# Altium PCB PCB1.PcbDoc (part 7 of 12)
Units mm, origin at the board's own origin, x right, y up, seen from the top; angles counter-clockwise.
Board outline 100 x 100 mm, 6 copper layers (Top Layer, Int1 (GND), Int2 (Sign), Int3 (Sign), Int4 (PWR), Bottom Layer), stack 1.538 mm thick; 614 components, 712 nets, 3014 pads, 1096 vias.
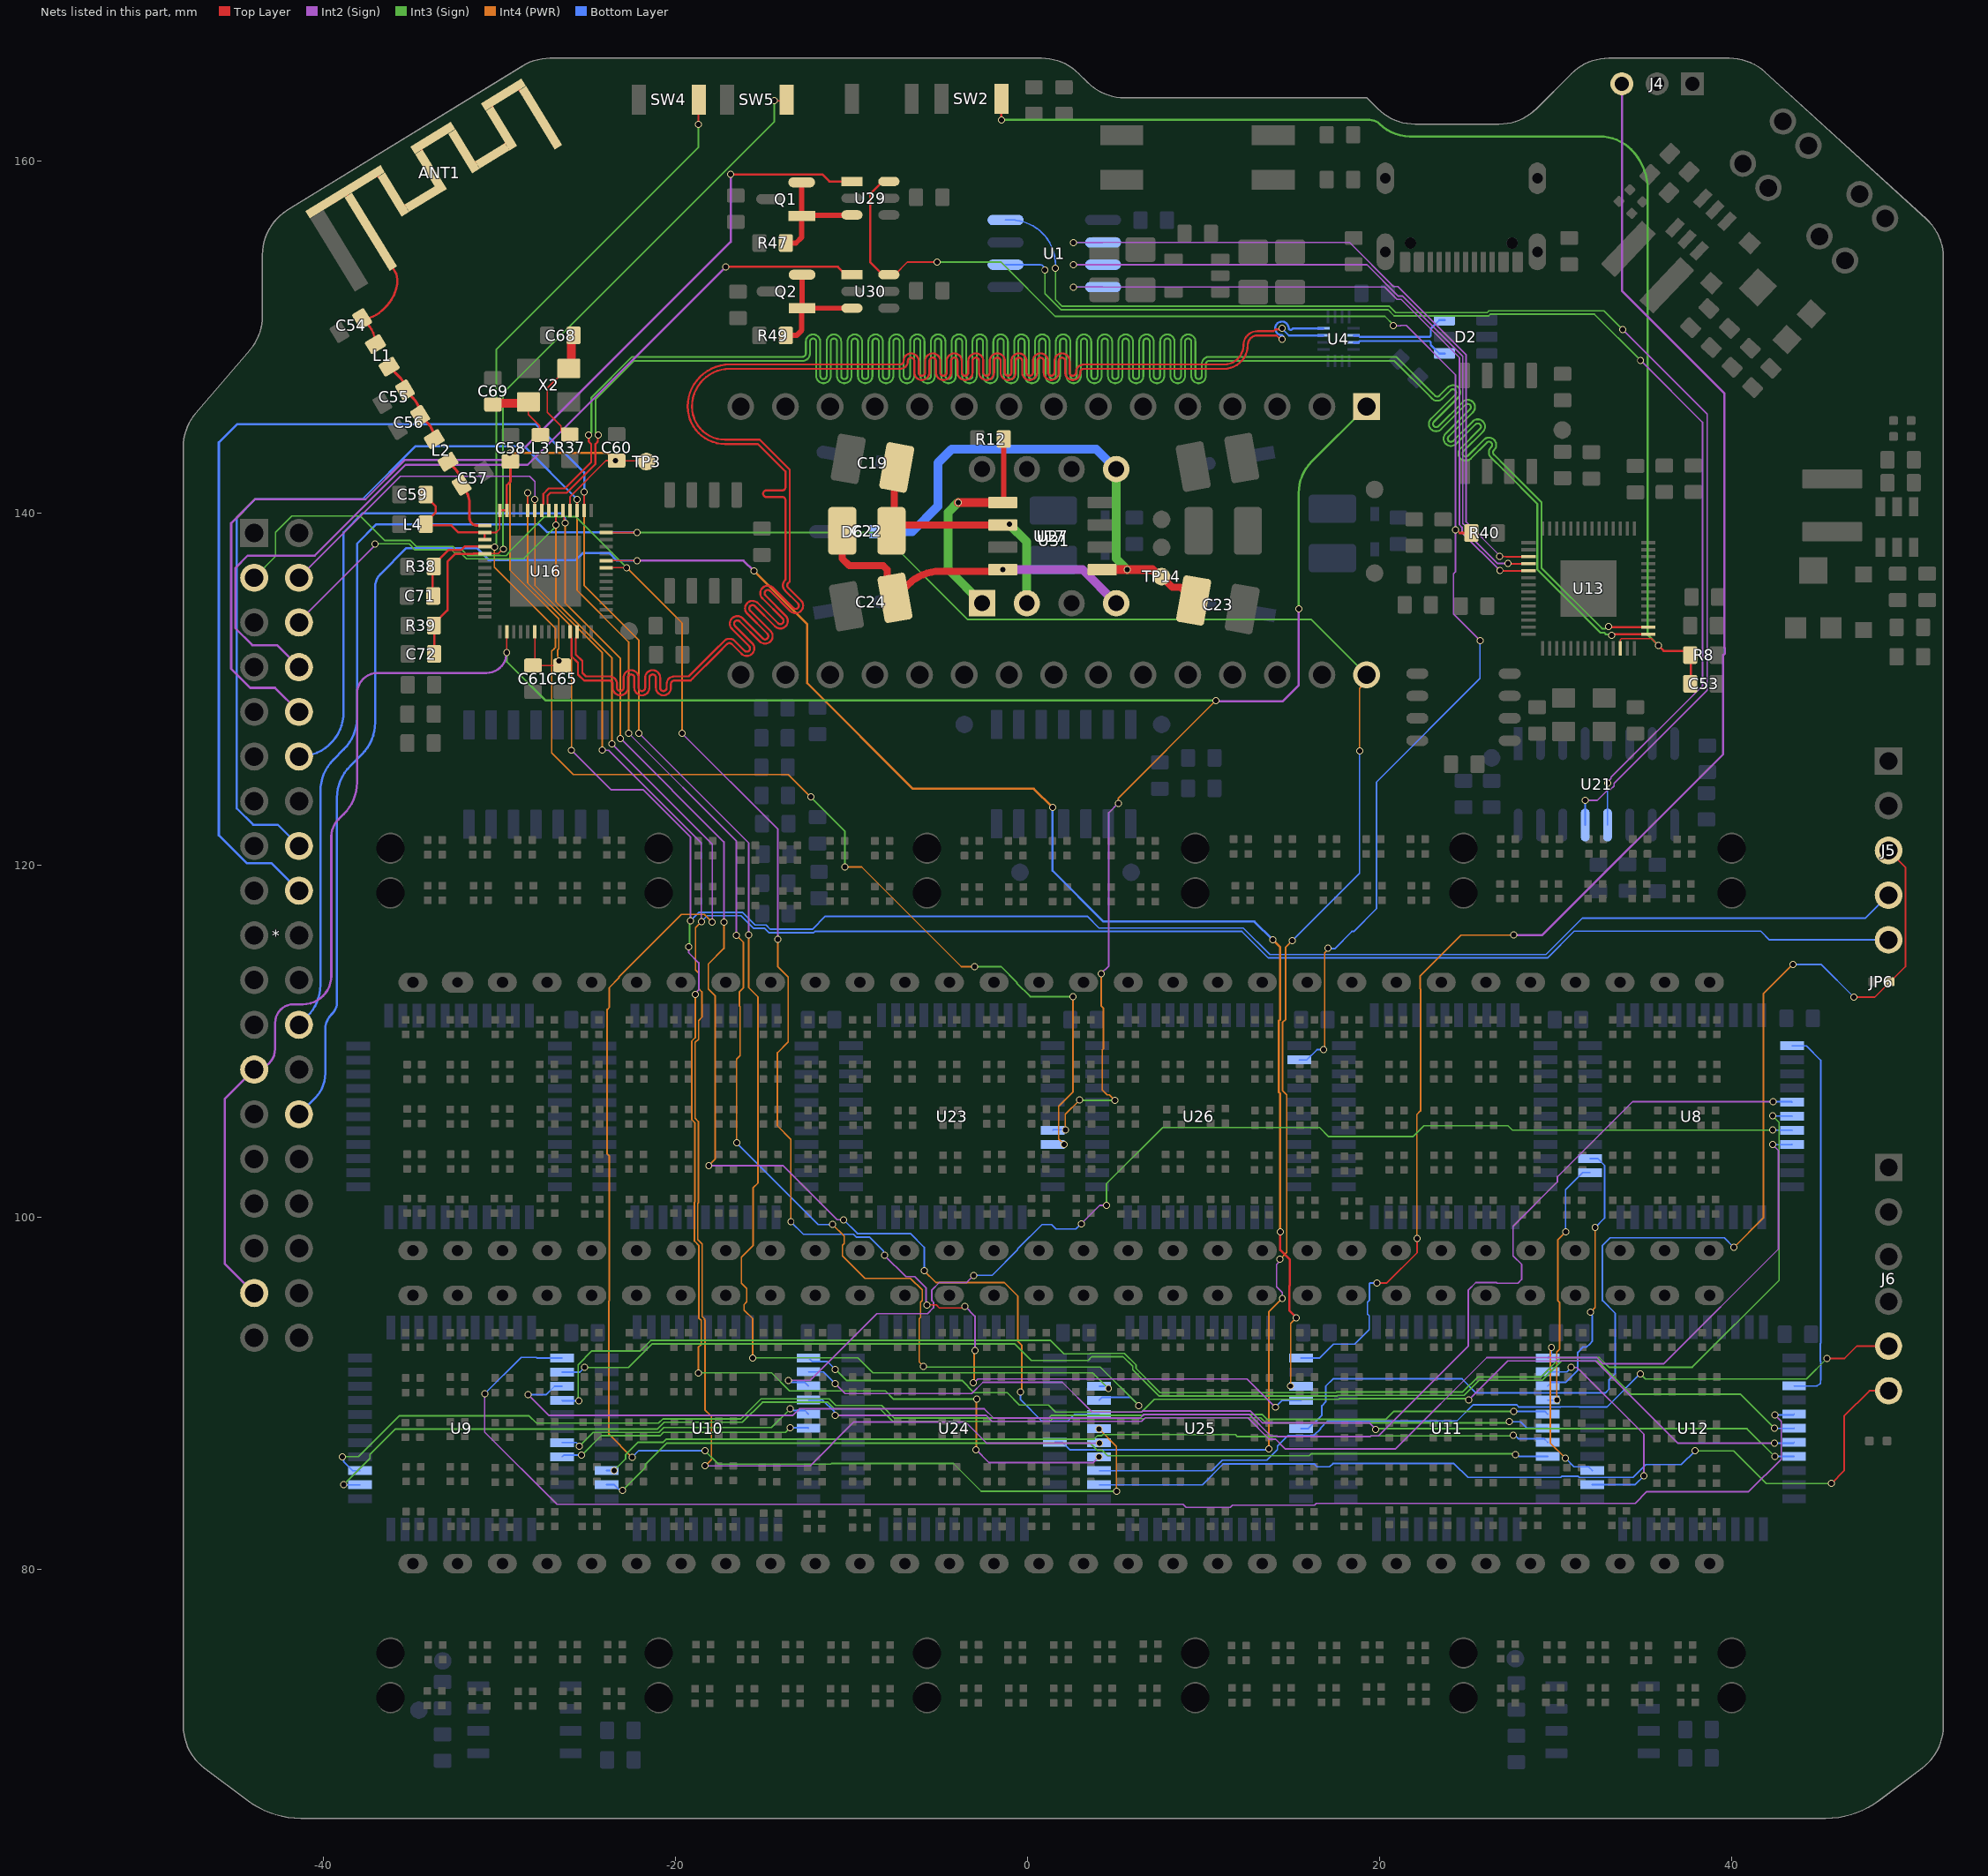
[diagram p10: the nets of this part, all layers, seen from the top]

## Via types
v1: diameter 0.4, hole 0.3, Top Layer to Bottom Layer, tented both sides, 1087 vias
v2: diameter 0.4, hole 0.3, Top Layer to Bottom Layer, 6 vias
v3: diameter 0.4, hole 0.3, Top Layer to Bottom Layer, tented top, 2 vias
v4: diameter 0.6, hole 0.5, Top Layer to Bottom Layer, 1 vias

## Nets (pads, with @x,y where several pads share a name; then routed paths per layer and width w, separated by ;. In a path a pad name is that pad's centre, name@x,y a point inside that pad or via, vN(x,y) a via of type N, cw(c..) or ccw(c..) an arc to the next point about the centre after c; other vN are vias at no path point) (continued)
D12: *.24 U16.41 U24.7 U31.30 | length 150.6
  Top Layer w0.09: U16.41@-23.952,138.918 v1(-22.187,138.918)
  Int2 (Sign) w0.09: v1(14.323,97.615) 14.263,97.556 14.263,97.454 14.136,97.328 14.136,96.063 14.462,95.738 v1(14.462,95.399)
  Int3 (Sign) w0.09: v1(-22.187,138.918) -8.364,138.918 -3.415,133.969 16.109,133.969 U31.30@19.251,130.827
  Int4 (PWR) w0.09: v1(13.691,86.836) 13.691,94.628 v1(14.462,95.399) ; v1(14.323,97.615) 14.715,98.008 14.715,106.963 14.467,107.211 14.467,111.068 14.655,111.255 14.655,115.351 v1(15.035,115.732) ; v1(18.852,126.499) 18.852,130.057 19.251,130.456 U31.30@19.251,130.827
  Bottom Layer w0.09: U24.7@1.54,87.223 1.965,87.223 2.385,86.803 13.657,86.803 v1(13.691,86.836) ; v1(15.035,115.732) 18.852,119.548 v1(18.852,126.499)
  Bottom Layer w0.127: *.24@-41.409,110.943 -40.936,111.416 ccw(c-42.732,113.212) -40.192,113.212 -40.192,124.209 cw(c-37.652,124.209) -39.448,126.005 -38.859,126.595 ccw(c-40.655,128.391) -38.115,128.391 -38.115,138.272 -37.004,139.383 -27.759,139.383 -27.294,138.918 v1(-22.187,138.918)
D13: *.25 *.35 U16.16 U23.7 U31.1 | length 144.4
  Top Layer w0.09: v1(-29.606,132.085) -29.606,132.58 -29.604,132.581 U16.16@-29.604,133.265
  Int2 (Sign) w0.09: v1(4.167,113.85) 4.605,114.287 4.605,122.995 v1(5.137,123.527)
  Int2 (Sign) w0.127: *.35@-43.949,95.703 -45.632,97.385 -45.632,106.72 *.25@-43.949,108.403 ccw(c-43.949,109.587) -42.765,109.587 -42.765,111.06 cw(c-41.715,111.06) -41.715,112.11 -41.189,112.11 ccw(c-41.189,113.729) -39.57,113.729 -39.57,121.638 cw(c-38.198,121.638) -39.168,122.608 -38.859,122.917 ccw(c-40.655,124.713) -38.115,124.713 -38.115,129.75 cw(c-36.93,129.75) -36.93,130.935 -30.754,130.935 ccw(c-30.754,132.085) -29.698,131.631 ; -29.69,131.657 v1(-29.606,132.085) ; v1(10.695,129.365) 10.744,129.316 14.464,129.316 15.39,130.243 v1(15.39,134.565)
  Int3 (Sign) w0.09: v1(2.95,106.675) 2.967,106.658 4.937,106.658 v1(4.954,106.641)
  Int3 (Sign) w0.127: v1(-29.606,132.085) -29.606,131.579 -27.391,129.364 v1(10.695,129.365) v1(10.695,129.365) ; v1(15.39,134.565) 15.39,141.154 cw(c17.93,141.154) 16.134,142.95 U31.1@19.251,146.067
  Int4 (PWR) w0.09: v1(2.129,104.981) 2.129,105.854 v1(2.95,106.675) ; v1(4.167,113.85) 4.167,112.021 4.301,111.887 4.301,109.594 4.237,109.53 4.237,107.237 4.505,106.968 4.626,106.968 v1(4.954,106.641) ; v1(5.137,123.527) 5.137,123.812 10.69,129.365 v1(10.695,129.365)
  Bottom Layer w0.09: U23.7@1.422,104.948 1.455,104.981 v1(2.129,104.981)
DAC-SS_1: U1.2 U13.3 | length 40.5
  Top Layer w0.09: v1(26.809,137.563) 27.182,137.535 ; U13.3@28.453,137.535 27.189,137.535 ; 27.182,137.535 ccw(c27.189,137.625) 27.189,137.535 ; 27.182,137.535 ccw(c27.189,137.625) 27.189,137.535
  Int2 (Sign) w0.09: v1(2.592,155.388) 18.283,155.388 20.782,152.888 21.02,152.888 24.904,149.004 24.904,139.513 26.809,137.608 v1(26.809,137.563)
  Bottom Layer w0.09: v1(2.592,155.388) U1.2@4.275,155.388
DAC_0_OUT_9: U1.8 U21.13 | length 72.8
  Int2 (Sign) w0.09: v1(31.67,123.689) 32.347,123.689 32.954,124.296 33.094,124.296 33.312,124.514 33.312,124.654 38.605,129.947 38.605,145.642 v1(33.81,150.437)
  Int3 (Sign) w0.09: v1(1.575,153.915) 1.575,152.148 1.959,151.764 20.542,151.764 20.896,151.411 26.103,151.411 26.197,151.504 32.742,151.504 v1(33.81,150.437)
  Bottom Layer w0.09: U1.8@-1.265,156.668 -0.965,156.668 cw(c-0.965,154.128) 1.575,154.128 v1(1.575,153.915) ; U21.13@31.67,122.292 v1(31.67,123.689)
DAC_1_OUT_9: U1.6 U21.12 | length 69.3
  Int2 (Sign) w0.09: v1(32.94,124.668) 32.94,124.744 33.138,124.943 33.138,125.007 38.336,130.204 38.336,145.174 v1(34.815,148.695)
  Int3 (Sign) w0.09: v1(0.975,153.825) 0.975,152.48 1.88,151.574 20.464,151.574 20.817,151.221 26.181,151.221 26.275,151.314 32.196,151.314 v1(34.815,148.695)
  Bottom Layer w0.09: U1.6@-1.265,154.128 0.672,154.128 cw(c0.672,153.825) v1(0.975,153.825) ; U21.12@32.94,122.292 v1(32.94,124.668)
DAC_CLOCK_1: U1.3 U13.4 | length 40.3
  Top Layer w0.09: v1(27.29,137.152) 27.308,137.135 U13.4@28.453,137.135
  Int2 (Sign) w0.09: v1(2.592,154.128) 19.274,154.128 21.057,152.345 21.295,152.345 24.714,148.925 24.714,139.434 24.861,139.286 24.861,138.984 26.693,137.152 v1(27.29,137.152)
  Bottom Layer w0.09: v1(2.592,154.128) U1.3@4.275,154.128
DAC_DATA_1: U1.4 U13.5 | length 40
  Top Layer w0.09: v1(26.82,136.761) 26.845,136.735 U13.5@28.453,136.735
  Int2 (Sign) w0.09: v1(2.592,152.858) 20.275,152.858 20.979,152.155 21.216,152.155 24.524,148.847 24.524,139.355 24.671,139.208 24.671,138.905 26.816,136.761 v1(26.82,136.761)
  Bottom Layer w0.09: v1(2.592,152.858) U1.4@4.275,152.858
DE0_3: U8.5 U9.3 | length 87.8
  Int2 (Sign) w0.09: v1(-28.384,89.927) -27.215,88.758 -13.339,88.758 -12.971,89.127 -2.469,89.127 -1.945,88.603 6.38,88.603 6.528,88.751 6.541,88.751 6.598,88.808 12.577,88.808 13.797,87.588 14.155,87.588 14.201,87.543 19.44,87.543 19.486,87.589 19.928,87.589 25.033,92.694 25.033,94.751 ; 25.033,94.751 25.033,95.275 25.031,95.277 25.031,95.875 25.454,96.298 26.63,96.298 26.665,96.262 27.841,96.262 28.059,96.48 28.059,97.328 27.571,97.817 27.571,99.499 30.092,102.021 30.092,102.307 34.361,106.576 v1(42.35,106.576)
  Bottom Layer w0.09: v1(-28.384,89.927) -27.366,89.927 -26.885,90.408 U9.3@-26.46,90.408 ; v1(42.35,106.576) 43.394,106.576 U8.5@43.422,106.548
DE1_3: U8.6 U9.4 | length 86.9
  Int3 (Sign) w0.09: v1(-25.503,89.586) -25.548,89.632 -25.548,91.629 -24.76,92.418 -22.011,92.418 -21.422,93.007 1.301,93.007 1.904,92.404 1.904,92.398 2.05,92.252 3.531,92.252 3.556,92.278 5.495,92.278 6.151,91.621 6.151,91.422 7.525,90.048 17.508,90.048 17.544,90.084 24.712,90.084 25.559,90.932 29.142,90.932 30.248,92.037 32.471,92.037 33.019,91.49 37.755,91.49 42.688,96.422 42.688,105.398 v1(42.323,105.763)
  Bottom Layer w0.09: U9.4@-26.46,89.608 -26.439,89.586 v1(-25.503,89.586) ; v1(42.323,105.763) 43.407,105.763 U8.6@43.422,105.748
DEV_BOOT: *.28 U16.37 U25.3 | length 125
  Top Layer w0.09: U16.37@-23.952,137.318 v1(-22.199,137.318)
  Top Layer w0.127: v1(14.343,99.191) 14.343,98.147 14.899,97.591 14.899,96.139 14.852,96.093 14.852,94.719 15.247,94.324 v1(15.247,94.292)
  Int2 (Sign) w0.127: v1(-22.199,137.318) -16.156,137.318 v1(-15.565,136.727)
  Int4 (PWR) w0.09: v1(14.937,90.42) 14.937,93.982 v1(15.247,94.292)
  Int4 (PWR) w0.127: v1(-15.565,136.727) -12.525,133.687 -12.525,130.352 -6.531,124.358 0.342,124.358 v1(1.409,123.291) ; v1(13.914,115.771) 14.343,115.342 14.343,111.239 14.259,111.154 14.259,107.124 14.343,107.04 v1(14.343,99.191)
  Bottom Layer w0.127: *.28@-41.409,105.863 -40.503,106.769 ccw(c-41.923,108.189) -39.915,108.189 -39.915,110.689 cw(c-38.737,110.689) -39.57,111.521 -39.533,111.559 ccw(c-40.227,112.253) -39.245,112.253 -39.245,123.846 cw(c-36.705,123.846) -38.501,125.642 -37.824,126.319 ccw(c-39.62,128.115) -37.08,128.115 -37.08,135.831 cw(c-36.083,135.831) -36.788,136.536 -35.3,138.024 -31.301,138.024 -30.625,137.347 -25.684,137.347 -25.291,137.74 -23.767,137.74 -23.345,137.318 v1(-22.199,137.318) ; v1(1.409,123.291) 1.409,119.698 4.299,116.808 12.877,116.808 v1(13.914,115.771)
DEV_RESET: *.3 U16.36 U25.4 | length 105.9
  Top Layer w0.09: U16.36@-23.952,136.918 v1(-22.788,136.918) ; v1(-5.726,95.028) -5.201,95.028 -5.026,94.854 -3.743,94.854 -3.647,94.95 v1(-3.563,94.95)
  Int2 (Sign) w0.09: v1(-19.648,127.506) -14.197,122.055 v1(-14.197,115.809) ; v1(-8.142,97.856) -8.142,97.847 -6.929,96.635 -6.419,96.635 -5.775,95.991 -5.775,95.077 v1(-5.726,95.028) ; v1(-3.563,94.95) -3.002,94.388 v1(-3.002,92.445) ; v1(-3.093,90.614) -3.038,90.614 -2.828,90.824 12.456,90.824 v1(14.063,89.217)
  Int3 (Sign) w0.09: *.3@-43.949,136.343 -42.736,137.556 -42.736,138.931 -41.812,139.855 -37.929,139.855 -36.532,138.458 -35.077,138.458 -34.737,138.118 -32.668,138.118 -32.5,137.949 -32.156,137.949 -31.812,137.605 -29.952,137.605 -29.947,137.599 -29.638,137.599 -29.42,137.817 -29.42,137.846 -27.449,139.818 -26.453,139.818 -26.451,139.821 -26.447,139.821 -26.446,139.822 -26.137,139.822 -26.133,139.818 -25.688,139.818 v1(-22.788,136.918)
  Int4 (PWR) w0.09: v1(-22.788,136.918) -19.648,133.778 v1(-19.648,127.506) ; v1(-14.197,115.809) -14.197,114.237 -13.615,113.655 -13.615,109.964 -14.228,109.351 -14.228,105.207 -13.463,104.441 v1(-13.463,99.752) ; v1(-3.093,90.614) -3.047,90.66 -3.047,92.4 v1(-3.002,92.445)
  Bottom Layer w0.09: v1(-13.463,99.752) -12.75,99.039 -9.905,99.039 -9.752,98.887 -9.007,98.887 -8.201,98.081 -8.201,97.915 v1(-8.142,97.856) ; v1(14.063,89.217) 14.454,89.608 U25.4@15.525,89.608
DF0_3: U8.7 U10.3 | length 66.5
  Int2 (Sign) w0.09: v1(-13.601,90.742) -12.354,90.742 -8.569,94.527 -5.702,94.527 -5.354,94.874 -5.354,95.182 -5.449,95.277 -5.449,95.875 -5.026,96.298 -3.479,96.298 v1(-3.067,96.71) ; v1(3.041,99.642) 4.086,100.686 v1(4.47,100.686)
  Int3 (Sign) w0.09: v1(4.47,100.686) 4.47,101.915 7.667,105.112 16.579,105.112 17.103,104.588 21.881,104.588 22.504,105.21 27.281,105.21 27.532,104.96 v1(42.316,104.96)
  Bottom Layer w0.09: v1(-13.601,90.742) -13.518,90.742 -13.404,90.628 -12.665,90.628 U10.3@-12.46,90.423 ; v1(-3.067,96.71) -2.022,96.71 -0.576,98.156 -0.576,98.208 0.811,99.595 1.356,99.595 1.611,99.34 2.74,99.34 v1(3.041,99.642) ; v1(42.316,104.96) 43.41,104.96 U8.7@43.422,104.948
DF1_3: U8.8 U10.4 | length 68.7
  Int2 (Sign) w0.09: v1(-10.932,88.755) -2.366,88.755 -2.024,88.413 6.458,88.413 6.606,88.561 6.619,88.561 6.677,88.618 12.498,88.618 13.718,87.398 14.077,87.398 14.63,86.845 20.887,86.845 26.08,92.037 32.336,92.037 32.694,91.68 36.127,91.68 42.649,98.201 42.649,103.799 v1(42.316,104.133)
  Bottom Layer w0.09: U10.4@-12.46,89.623 -11.65,89.623 -10.992,88.964 -10.992,88.814 v1(-10.932,88.755) ; v1(42.316,104.133) 43.407,104.133 U8.8@43.422,104.148
DG0_3: U8.25 U11.3 | length 15.6
  Int4 (PWR) w0.09: v1(31.968,94.614) 32.234,94.88 v1(32.234,99.425)
  Bottom Layer w0.09: U11.3@29.54,90.423 29.745,90.628 30.556,90.628 31.25,91.321 31.25,92.333 31.558,92.641 31.759,92.641 31.924,92.806 32.068,92.949 32.068,93.952 32.068,94.431 31.926,94.572 v1(31.968,94.614) ; U8.25@31.952,103.348 32.377,103.348 32.772,102.953 32.772,99.963 v1(32.234,99.425)
DG1_3: U8.24 U11.4 | length 14.6
  Int4 (PWR) w0.09: v1(30.058,89.623) 30.058,92.354 30.222,92.518 30.222,95.166 30.111,95.277 30.111,98.726 v1(30.557,99.173)
  Bottom Layer w0.09: U11.4@29.54,89.623 v1(30.058,89.623) ; v1(30.557,99.173) 30.557,101.578 31.527,102.548 U8.24@31.952,102.548
DH0_3: U8.1 U12.3 | length 21.9
  Bottom Layer w0.09: U8.1@43.422,109.748 44.232,109.748 45.05,108.93 45.05,92.856 45.036,92.843 45.036,91.833 45.05,91.819 45.05,90.887 45.05,90.884 45.041,90.608 cw(c44.951,90.611) 45.001,90.536 44.854,90.438 cw(c44.804,90.513) 44.804,90.423 U12.3@43.54,90.423
EF0_3: U9.7 U10.5 | length 15.1
  Int3 (Sign) w0.09: v1(-25.479,87.003) -24.69,87.791 -20.96,87.791 -20.685,88.066 -14.557,88.066 v1(-13.494,89.13)
  Bottom Layer w0.09: U9.7@-26.46,87.208 -25.656,87.208 -25.479,87.031 v1(-25.479,87.003) ; v1(-13.494,89.13) -13.41,89.13 -13.307,89.028 -12.665,89.028 U10.5@-12.46,88.823
EF1_3: U9.8 U10.6 | length 14.7
  Int3 (Sign) w0.09: v1(-25.347,86.492) -24.238,87.601 -20.881,87.601 -20.699,87.783 -13.762,87.783 v1(-13.491,88.053)
  Bottom Layer w0.09: U9.8@-26.46,86.408 -26.376,86.492 v1(-25.347,86.492) ; v1(-13.491,88.053) -12.491,88.053 U10.6@-12.46,88.023
EG0_3: U9.25 U11.5 | length 72.6
  Int3 (Sign) w0.09: v1(-38.932,86.408) -38.038,86.408 -35.721,88.725 -28.325,88.725 -27.913,88.313 -20.976,88.313 -20.737,88.551 -16.295,88.551 -15.154,89.692 -11.284,89.692 -10.909,89.317 -8.307,89.317 -7.593,88.603 1.181,88.603 1.331,88.753 3.935,88.753 3.937,88.751 6.541,88.751 6.598,88.808 13.317,88.808 13.602,88.523 20.332,88.523 20.794,88.985 v1(27.607,88.985)
  Bottom Layer w0.09: v1(-38.932,86.408) -38.873,86.348 -38.873,86.125 -38.355,85.608 U9.25@-37.93,85.608 ; v1(27.607,88.985) 29.378,88.985 U11.5@29.54,88.823
EG1_3: U9.24 U11.6 | length 72.3
  Int3 (Sign) w0.09: v1(-38.877,84.808) -37.373,86.312 -37.373,86.536 -35.928,87.981 -21.039,87.981 -20.658,88.361 -16.216,88.361 -15.075,89.502 -11.363,89.502 -10.988,89.127 -8.386,89.127 -7.672,88.413 1.259,88.413 1.409,88.563 3.856,88.563 3.858,88.561 6.619,88.561 6.677,88.618 13.238,88.618 13.523,88.333 27.218,88.333 27.279,88.393 v1(27.363,88.393)
  Bottom Layer w0.09: v1(-38.877,84.808) U9.24@-37.93,84.808 ; v1(27.363,88.393) 27.993,88.393 28.363,88.023 U11.6@29.54,88.023
EH0_3: U9.1 U12.5 | length 87.8
  Int2 (Sign) w0.09: v1(-30.855,89.98) -30.855,87.799 -26.754,83.698 8.831,83.698 9.002,83.527 11.493,83.527 11.621,83.655 14.147,83.655 14.15,83.652 16.293,83.652 16.396,83.754 34.508,83.754 35.175,84.421 40.962,84.421 42.81,86.269 42.81,88.411 v1(42.44,88.781)
  Bottom Layer w0.09: v1(-30.855,89.98) -28.783,92.052 -27.917,92.052 -27.873,92.008 U9.1@-26.46,92.008 ; v1(42.44,88.781) 43.498,88.781 U12.5@43.54,88.823
EH1_3: U9.2 U12.6 | length 74.6
  Int3 (Sign) w0.09: v1(-25.176,91.475) -22.685,91.475 -21.343,92.817 -0.749,92.817 0.19,91.878 3.426,91.878 3.635,92.088 5.416,92.088 5.961,91.543 5.961,91.343 7.446,89.858 17.587,89.858 17.622,89.894 24.79,89.894 25.638,90.742 29.22,90.742 30.326,91.847 32.392,91.847 34.279,89.961 40.486,89.961 v1(42.431,88.015)
  Bottom Layer w0.09: U9.2@-26.46,91.208 -25.443,91.208 v1(-25.176,91.475) ; v1(42.431,88.015) 43.532,88.015 U12.6@43.54,88.023
ESD_U+_2: D2.6 U4.2 | length 5.8
  Bottom Layer w0.116: U4.2@18.506,150.108 18.785,150.108 18.863,150.029 21.901,150.029 22.829,150.029 22.897,150.097 22.897,150.495 23.381,150.979 D2.6@23.681,150.979
ESD_U-_2: D2.4 U4.3 | length 5.6
  Bottom Layer w0.116: U4.3@18.506,149.708 18.785,149.708 18.863,149.786 21.8,149.786 22.829,149.786 22.897,149.718 22.897,149.563 23.381,149.079 D2.4@23.681,149.079
ESP32_Rx_1: U13.29 U16.49 | length 177.8
  Top Layer w0.116: U16.49@-27.204,140.17 -27.204,140.448 -27.283,140.527 -27.283,141.008 -27.12,141.171 -26.2,141.171 -24.562,142.809 -24.562,143.94 -24.425,144.076 -24.425,144.439 v1(-24.415,144.45) ; v1(33.164,133.065) 33.241,133.065 33.311,133.135 U13.29@35.26,133.135
  Int3 (Sign) w0.105: v1(-24.415,144.45) -24.562,144.597 -24.562,146.483 -22.382,148.663 -12.96,148.663 -12.791,148.663 ccw(c-12.791,149.075) -12.379,149.075 -12.379,149.753 cw(c-12.199,149.753) -12.019,149.753 -12.019,147.805 ccw(c-11.607,147.805) -11.195,147.805 -11.195,149.753 cw(c-11.015,149.753) -10.835,149.753 -10.835,147.805 ccw(c-10.423,147.805) -10.011,147.805 -10.011,149.753 cw(c-9.831,149.753) -9.651,149.753 -9.651,147.805 ccw(c-9.239,147.805) -8.827,147.805 -8.827,149.753 cw(c-8.647,149.753) -8.467,149.753 -8.467,147.805 ccw(c-8.055,147.805) -7.643,147.805 -7.643,149.753 cw(c-7.463,149.753) -7.283,149.753 -7.283,147.805 ccw(c-6.871,147.805) -6.459,147.805 -6.459,149.753 cw(c-6.279,149.753) -6.099,149.753 -6.099,147.805 ccw(c-5.687,147.805) -5.275,147.805 -5.275,149.753 cw(c-5.095,149.753) -4.915,149.753 -4.915,147.805 ccw(c-4.503,147.805) -4.091,147.805 -4.091,149.753 cw(c-3.911,149.753) -3.731,149.753 -3.731,147.805 ccw(c-3.319,147.805) -2.907,147.805 -2.907,149.753 cw(c-2.727,149.753) -2.547,149.753 -2.547,147.805 ccw(c-2.135,147.805) -1.723,147.805 -1.723,149.753 cw(c-1.543,149.753) -1.363,149.753 -1.363,147.805 ccw(c-0.951,147.805) -0.539,147.805 -0.539,149.753 cw(c-0.359,149.753) -0.179,149.753 -0.179,147.805 ccw(c0.233,147.805) 0.645,147.805 0.645,149.753 cw(c0.825,149.753) 1.005,149.753 1.005,147.805 ccw(c1.417,147.805) 1.829,147.805 1.829,149.753 cw(c2.009,149.753) 2.189,149.753 2.189,147.805 ccw(c2.601,147.805) 3.013,147.805 3.013,149.753 cw(c3.193,149.753) 3.373,149.753 3.373,147.805 ccw(c3.785,147.805) 4.197,147.805 4.197,149.753 cw(c4.377,149.753) 4.557,149.753 4.557,147.805 ccw(c4.969,147.805) 5.382,147.805 5.382,149.753 cw(c5.561,149.753) 5.741,149.753 5.741,147.805 ccw(c6.153,147.805) 6.566,147.805 6.566,149.753 cw(c6.745,149.753) 6.925,149.753 6.925,147.805 ccw(c7.337,147.805) 7.75,147.805 7.75,149.753 cw(c7.929,149.753) 8.109,149.753 8.109,147.805 ccw(c8.521,147.805) 8.934,147.805 8.934,149.753 cw(c9.113,149.753) 9.293,149.753 9.293,147.805 ccw(c9.705,147.805) 10.118,147.805 10.118,148.483 cw(c10.297,148.483) 10.297,148.663 10.797,148.663 20.829,148.663 22.852,146.641 22.971,146.521 ccw(c23.263,146.813) 23.554,146.521 24.034,147 cw(c24.161,146.873) 24.288,146.747 22.911,145.369 ccw(c23.202,145.077) 22.911,144.786 ccw(c23.202,145.077) 23.494,144.786 ; 23.494,144.787 24.871,146.163 cw(c24.998,146.036) 25.125,146.163 cw(c24.998,146.036) 25.126,145.91 23.748,144.532 ccw(c24.039,144.24) 23.748,143.948 ccw(c24.039,144.24) 24.331,143.949 25.441,145.058 cw(c25.568,144.931) 25.695,145.058 cw(c25.568,144.931) 25.695,144.805 24.585,143.694 ccw(c24.877,143.403) 24.585,143.111 ccw(c24.877,143.403) 25.169,143.112 26.076,144.02 cw(c26.203,143.893) 26.331,143.766 26.32,143.755 ccw(c26.612,143.464) 26.32,143.172 27.011,142.481 28.95,140.543 28.95,136.807 32.538,133.219 32.753,133.219 32.851,133.121 33.108,133.121 v1(33.164,133.065)
ESP32_Tx_1: U13.30 U16.50 | length 178.2
  Top Layer w0.116: U16.50@-27.604,140.17 -27.604,140.448 -27.526,140.527 -27.526,141.109 -27.221,141.414 -26.301,141.414 -24.804,142.91 -24.804,143.94 -24.941,144.076 -24.941,144.444 v1(-24.947,144.45) ; v1(32.992,133.563) 33.02,133.535 U13.30@35.26,133.535
  Int3 (Sign) w0.105: v1(-24.947,144.45) -24.942,144.45 -24.794,144.597 -24.794,146.58 -22.478,148.896 -12.96,148.896 -12.791,148.896 ccw(c-12.791,149.075) -12.611,149.075 -12.611,149.753 cw(c-12.199,149.753) -11.787,149.753 -11.787,147.805 ccw(c-11.607,147.805) -11.427,147.805 -11.427,149.753 cw(c-11.015,149.753) -10.603,149.753 -10.603,147.805 ccw(c-10.423,147.805) -10.243,147.805 -10.243,149.753 cw(c-9.831,149.753) -9.419,149.753 -9.419,147.805 ccw(c-9.239,147.805) -9.059,147.805 -9.059,149.753 cw(c-8.647,149.753) -8.235,149.753 -8.235,147.805 ccw(c-8.055,147.805) -7.875,147.805 -7.875,149.753 cw(c-7.463,149.753) -7.051,149.753 -7.051,147.805 ccw(c-6.871,147.805) -6.691,147.805 -6.691,149.753 cw(c-6.279,149.753) -5.867,149.753 -5.867,147.805 ccw(c-5.687,147.805) -5.507,147.805 -5.507,149.753 cw(c-5.095,149.753) -4.683,149.753 -4.683,147.805 ccw(c-4.503,147.805) -4.323,147.805 -4.323,149.753 cw(c-3.911,149.753) -3.499,149.753 -3.499,147.805 ccw(c-3.319,147.805) -3.139,147.805 -3.139,149.753 cw(c-2.727,149.753) -2.315,149.753 -2.315,147.805 ccw(c-2.135,147.805) -1.955,147.805 -1.955,149.753 cw(c-1.543,149.753) -1.131,149.753 -1.131,147.805 ccw(c-0.951,147.805) -0.771,147.805 -0.771,149.753 cw(c-0.359,149.753) 0.053,149.753 0.053,147.805 ccw(c0.233,147.805) 0.413,147.805 0.413,149.753 cw(c0.825,149.753) 1.237,149.753 1.237,147.805 ccw(c1.417,147.805) 1.597,147.805 1.597,149.753 cw(c2.009,149.753) 2.421,149.753 2.421,147.805 ccw(c2.601,147.805) 2.781,147.805 2.781,149.753 cw(c3.193,149.753) 3.605,149.753 3.605,147.805 ccw(c3.785,147.805) 3.965,147.805 3.965,149.753 cw(c4.377,149.753) 4.79,149.753 4.79,147.805 ccw(c4.969,147.805) 5.149,147.805 5.149,149.753 cw(c5.561,149.753) 5.974,149.753 5.974,147.805 ccw(c6.153,147.805) 6.333,147.805 6.333,149.753 cw(c6.745,149.753) 7.158,149.753 7.158,147.805 ccw(c7.337,147.805) 7.517,147.805 7.517,149.753 cw(c7.929,149.753) 8.342,149.753 8.342,147.805 ccw(c8.521,147.805) 8.701,147.805 8.701,149.753 cw(c9.113,149.753) 9.526,149.753 9.526,147.805 ccw(c9.705,147.805) 9.885,147.805 9.885,148.483 cw(c10.297,148.483) 10.297,148.896 10.797,148.896 20.926,148.896 23.016,146.805 23.136,146.685 ccw(c23.263,146.813) 23.39,146.685 23.869,147.165 cw(c24.161,146.873) 24.414,147.199 24.418,147.199 24.452,147.166 cw(c24.161,146.873) 24.453,147.164 24.486,147.131 24.486,147.126 cw(c24.161,146.873) 24.452,146.581 23.075,145.204 ccw(c23.202,145.077) 23.075,144.95 ccw(c23.202,145.077) 23.329,144.95 24.707,146.328 cw(c24.998,146.036) 25.29,146.328 cw(c24.998,146.036) 25.289,145.744 ; 25.289,145.744 23.912,144.367 ccw(c24.039,144.24) 24.166,144.113 25.276,145.223 cw(c25.568,144.931) 25.859,145.223 cw(c25.568,144.931) 25.859,144.639 ; 25.858,144.639 24.749,143.53 ccw(c24.877,143.403) 24.749,143.276 ccw(c24.877,143.403) 25.003,143.275 25.912,144.184 cw(c26.203,143.893) 26.456,144.218 26.461,144.218 26.494,144.185 cw(c26.203,143.893) 26.496,144.183 26.529,144.15 26.529,144.145 cw(c26.203,143.893) 26.495,143.601 26.485,143.591 ccw(c26.612,143.464) 26.485,143.337 27.176,142.646 29.182,140.639 29.182,136.903 32.634,133.451 32.801,133.451 32.913,133.563 v1(32.992,133.563)
ESP_1_N: U4.12 U16.25 | length 105.6
  Top Layer w0.116: U16.25@-26.004,133.265 -26.004,132.988 -25.926,132.909 -25.926,131.884 -25.553,131.512 -25.553,130.84 -25.211,130.497 -24.555,130.497 -23.763,130.497 cw(c-23.763,130.313) -23.579,130.313 -23.579,130.091 ccw(c-23.151,130.091) -22.724,130.091 -22.724,130.662 cw(c-22.539,130.662) -22.354,130.662 -22.354,130.091 ccw(c-21.926,130.091) -21.499,130.091 -21.499,130.662 cw(c-21.314,130.662) -21.129,130.662 -21.129,130.091 ccw(c-20.702,130.091) -20.274,130.091 -20.274,130.313 cw(c-20.089,130.313) -20.089,130.497 -19.264,130.497 -19.159,130.497 -19.035,130.622 -17.639,132.018 -17.079,132.578 cw(c-16.948,132.447) -16.818,132.578 -16.266,132.026 ccw(c-15.963,132.328) -15.661,132.026 ccw(c-15.963,132.328) -15.625,132.59 -15.625,132.595 -16.634,133.603 cw(c-16.503,133.734) -16.634,133.864 cw(c-16.503,133.734) -16.372,133.864 -15.229,132.721 ccw(c-14.926,133.023) -14.624,132.72 ccw(c-14.926,133.023) -14.588,133.285 -14.588,133.29 -15.768,134.469 cw(c-15.637,134.6) -15.768,134.73 cw(c-15.637,134.6) -15.506,134.73 -14.363,133.587 ccw(c-14.06,133.889) -13.758,133.586 ccw(c-14.06,133.889) -13.722,134.151 -13.722,134.156 -14.902,135.335 cw(c-14.771,135.466) -14.902,135.596 cw(c-14.771,135.466) -14.64,135.596 -13.497,134.453 ccw(c-13.194,134.755) -12.892,134.452 ccw(c-13.194,134.755) -12.856,135.017 -12.856,135.022 -13.615,135.78 cw(c-13.484,135.911) -13.615,136.042 -13.527,136.13 -13.527,136.638 -13.527,136.72 -13.527,142.484 -15.225,144.183 -17.196,144.183 cw(c-17.196,146.067) -19.08,146.067 cw(c-16.932,146.067) -16.932,148.215 -7.42,148.215 -7.241,148.215 ccw(c-7.241,148.643) -6.813,148.643 -6.813,148.66 cw(c-6.629,148.66) -6.444,148.66 -6.444,148.004 ccw(c-6.016,148.004) -5.589,148.004 -5.589,148.66 cw(c-5.404,148.66) -5.219,148.66 -5.219,148.004 ccw(c-4.792,148.004) -4.364,148.004 -4.364,148.66 cw(c-4.179,148.66) -3.994,148.66 -3.994,148.004 ccw(c-3.567,148.004) -3.139,148.004 -3.139,148.66 cw(c-2.954,148.66) -2.77,148.66 -2.77,148.004 ccw(c-2.342,148.004) -1.915,148.004 -1.915,148.66 cw(c-1.73,148.66) -1.545,148.66 -1.545,148.004 ccw(c-1.117,148.004) -0.69,148.004 -0.69,148.66 cw(c-0.505,148.66) -0.32,148.66 -0.32,148.004 ccw(c0.107,148.004) 0.535,148.004 0.535,148.66 cw(c0.72,148.66) 0.904,148.66 0.904,148.004 ccw(c1.332,148.004) 1.759,148.004 1.759,148.66 cw(c1.944,148.66) 2.129,148.66 2.129,148.004 ccw(c2.557,148.004) 2.984,148.004 2.984,148.03 cw(c3.169,148.03) 3.169,148.215 3.99,148.215 11.148,148.215 ccw(c11.148,149.565) 12.498,149.565 cw(c13.04,149.565) 13.04,150.108 14.138,150.108 14.363,149.882 v1(14.44,149.882)
  Bottom Layer w0.116: v1(14.44,149.882) 14.485,149.927 ccw(c14.402,150.009) 14.41,150.124 cw(c14.44,150.508) 14.824,150.536 ccw(c14.939,150.545) 15.021,150.463 15.066,150.508 U4.12@16.804,150.508
ESP_1_P: U4.11 U16.26 | length 105.7
  Top Layer w0.116: U16.26@-25.604,133.265 -25.604,132.988 -25.683,132.909 -25.683,131.984 -25.311,131.612 -25.311,130.941 -25.11,130.74 -24.555,130.74 -23.763,130.74 cw(c-23.763,130.313) -23.336,130.313 -23.336,130.091 ccw(c-23.151,130.091) -22.966,130.091 -22.966,130.662 cw(c-22.539,130.662) -22.111,130.662 -22.111,130.091 ccw(c-21.926,130.091) -21.742,130.091 -21.742,130.662 cw(c-21.314,130.662) -20.887,130.662 -20.887,130.091 ccw(c-20.702,130.091) -20.517,130.091 -20.517,130.313 cw(c-20.089,130.313) -20.089,130.74 -19.264,130.74 -19.26,130.74 -19.035,130.965 -17.81,132.19 -17.251,132.749 cw(c-16.948,132.447) -16.646,132.749 -16.094,132.197 ccw(c-15.963,132.328) -15.833,132.197 ccw(c-15.963,132.328) -15.833,132.459 ; -15.833,132.459 -16.804,133.431 cw(c-16.503,133.734) -16.805,134.036 cw(c-16.503,133.734) -16.241,134.072 -16.236,134.072 -15.057,132.892 ccw(c-14.926,133.023) -14.795,132.892 ccw(c-14.926,133.023) -14.795,133.154 -15.938,134.297 cw(c-15.637,134.6) -15.939,134.902 cw(c-15.637,134.6) -15.375,134.938 -15.37,134.938 -14.191,133.758 ccw(c-14.06,133.889) -13.929,133.758 ccw(c-14.06,133.889) -13.929,134.02 -15.072,135.163 cw(c-14.771,135.466) -15.073,135.768 cw(c-14.771,135.466) -14.509,135.804 -14.504,135.804 -13.325,134.624 ccw(c-13.194,134.755) -13.063,134.624 ccw(c-13.194,134.755) -13.063,134.886 -13.786,135.608 cw(c-13.484,135.911) -13.787,136.213 -13.769,136.231 -13.769,136.638 -13.769,136.962 -13.769,139.946 -13.769,140.748 ccw(c-13.954,140.748) -13.954,140.933 -14.855,140.933 cw(c-14.855,141.118) -14.855,141.303 -13.954,141.303 ccw(c-13.954,141.487) -13.769,141.487 -13.769,141.915 -13.769,142.383 -15.326,143.94 -17.196,143.94 cw(c-17.196,146.067) -19.323,146.067 cw(c-16.932,146.067) -16.932,148.458 -7.42,148.458 -7.241,148.458 ccw(c-7.241,148.643) -7.056,148.643 -7.056,148.66 cw(c-6.629,148.66) -6.201,148.66 -6.201,148.004 ccw(c-6.016,148.004) -5.831,148.004 -5.831,148.66 cw(c-5.404,148.66) -4.976,148.66 -4.976,148.004 ccw(c-4.792,148.004) -4.607,148.004 -4.607,148.66 cw(c-4.179,148.66) -3.752,148.66 -3.752,148.004 ccw(c-3.567,148.004) -3.382,148.004 -3.382,148.66 cw(c-2.954,148.66) -2.527,148.66 -2.527,148.004 ccw(c-2.342,148.004) -2.157,148.004 -2.157,148.66 cw(c-1.73,148.66) -1.302,148.66 -1.302,148.004 ccw(c-1.117,148.004) -0.933,148.004 -0.933,148.66 cw(c-0.505,148.66) -0.078,148.66 -0.078,148.004 ccw(c0.107,148.004) 0.292,148.004 0.292,148.66 cw(c0.72,148.66) 1.147,148.66 1.147,148.004 ccw(c1.332,148.004) 1.517,148.004 1.517,148.66 cw(c1.944,148.66) 2.372,148.66 2.372,148.004 ccw(c2.557,148.004) 2.741,148.004 2.741,148.03 cw(c3.169,148.03) 3.169,148.458 3.99,148.458 11.148,148.458 ccw(c11.148,149.565) 12.255,149.565 cw(c13.04,149.565) 13.04,150.35 13.974,150.35 14.077,150.453 14.386,150.453 v1(14.44,150.508)
  Bottom Layer w0.116: v1(14.44,150.508) 14.84,150.108 U4.11@16.804,150.108
ESP_ANT_6: C55.2 C56.2 L1.2 L2.1 | length 5
  Top Layer w0.156: L1.2@-36.286,148.333 -35.68,147.727 cw(c-36.392,147.015) C55.2@-35.385,147.015 -34.942,146.572 cw(c-35.95,145.564) C56.2@-34.524,145.564 -34.106,145.145 cw(c-35.032,144.218) L2.1@-33.722,144.218
ESP_BOOT_6: C72.2 R39.1 SW5.2 U16.5 | length 41.7
  Top Layer w0.09: U16.5@-30.857,137.718 -30.155,137.718 -30.15,137.723 -30.082,137.723 -29.833,137.971 v1(-29.792,137.971) ; v1(-14.4,163.44) -13.763,163.44 SW5.2@-13.695,163.508
  Top Layer w0.127: C72.2@-33.728,131.915 C72.2@-33.728,132.015 -33.728,133.693 ccw(c-33.775,133.693) -33.741,133.727 -32.973,134.495 -32.973,137.249 -32.519,137.703 -31.505,137.703 -31.491,137.718 U16.5@-30.857,137.718
  Int3 (Sign) w0.09: v1(-29.792,137.971) -29.816,137.995 -29.816,146.853 -14.4,162.269 v1(-14.4,163.44)
ESP_PWR_FILTERED_6: C58.2 C59.2 C60.2 C61.2 C65.2 L4.2 TP3.1 U16.2 U16.3 U16.20 U16.46 U16.55 U16.56 | length 40.6
  Top Layer w0.09: U16.2@-30.857,138.918 -30.2,138.918 -30.004,139.113 U16.56@-30.004,140.17 ; v1(-29.431,143.428) -29.392,143.389 C58.2@-29.392,142.95 ; U16.20@-28.004,133.265 -28.004,131.458 C61.2@-28.108,131.355 -26.64,131.355 C65.2@-26.462,131.355 ; U16.46@-26.004,140.17 -26.004,140.947 -23.956,142.996 v1(-23.438,142.996) C60.2@-23.362,142.996 -23.347,142.98 -21.705,142.98 TP3.1@-21.667,142.942
  Top Layer w0.127: C59.2@-34.208,141.073 -34.208,140.973 -33.645,140.41 -33.645,140.045 -34.207,139.483 L4.2@-34.207,139.383 -34.142,139.318 -32.745,139.318 -32.345,138.918 U16.2@-30.857,138.918 U16.3@-30.857,138.518 ; U16.56@-30.004,140.17 U16.55@-29.604,140.17 -29.604,141.598 -29.392,141.81 C58.2@-29.392,142.95
  Int4 (PWR) w0.09: v1(-29.431,143.428) -29.42,143.417 -29.42,136.781 -26.643,134.004 -26.643,132.312 -26.717,132.239 -26.717,131.931 -26.699,131.913 -26.699,131.684 v1(-26.64,131.625)
  Int4 (PWR) w0.127: v1(-29.431,143.428) -23.87,143.428 v1(-23.438,142.996)
ESP_RESET_1: C71.2 R38.1 SW4.2 U16.4 U23.8 | length 94.6
  Top Layer w0.09: U16.4@-30.857,138.118 -30.524,138.102 -30.323,138.097 -30.308,138.097 v1(-30.305,138.094) ; v1(-18.708,162.088) -18.708,163.495 SW4.2@-18.695,163.508
  Top Layer w0.127: C71.2@-33.783,135.31 -33.825,135.352 -33.825,136.905 R38.1@-33.748,136.983 -33.748,137.083 -32.9,137.93 -32.184,137.93 -31.996,138.118 U16.4@-30.857,138.118
  Int3 (Sign) w0.09: v1(-30.305,138.094) -30.305,138.178 -30.2,138.283 -30.2,149.308 -18.708,160.8 v1(-18.708,162.088) ; v1(-12.33,123.885) -10.395,121.95 v1(-10.395,119.91) ; v1(-3.023,114.244) -1.505,114.244 -0.62,113.36 -0.62,113.308 0.14,112.548 2.555,112.548 v1(2.572,112.531)
  Int4 (PWR) w0.09: v1(-30.305,138.094) -30.305,136.936 -26.833,133.465 -26.833,132.391 -26.907,132.318 -26.907,132.312 -27.047,132.171 -27.047,126.387 -25.826,125.166 -13.611,125.166 v1(-12.33,123.885) ; v1(-10.395,119.91) -9.442,119.91 -3.776,114.244 v1(-3.023,114.244) ; v1(2.066,104.148) 1.757,104.457 1.757,106.316 2.572,107.131 v1(2.572,112.531)
ESP_XTAL_IN1_6: C69.2 L3.2 X2.3 | length 4.2
  Top Layer w0.09: X2.3@-28.375,146.335 -28.375,145.612 -27.745,144.982 -27.745,144.51 L3.2@-27.686,144.45
  Top Layer w0.5: C69.2@-30.387,146.185 -30.312,146.26 -28.45,146.26 X2.3@-28.375,146.335
ESP_XTAL_IN2_6: C68.2 R37.1 X2.1 | length 7
  Top Layer w0.09: X2.1@-26.075,148.235 -26.175,148.235 -27.299,147.111 -27.299,145.735 -26.526,144.962 -26.526,144.696 -26.237,144.696 R37.1@-26.022,144.482
  Top Layer w0.5: X2.1@-26.075,148.235 -25.939,148.371 -25.939,149.979 C68.2@-25.804,150.115
EX_GND_1: J5.3 JP6.1 U25.6 | length 68.8
  Top Layer w0.09: v1(46.935,112.515) 48.13,112.515 49.862,114.247 49.862,119.893 J5.3@48.905,120.85
  Int4 (PWR) w0.09: v1(40.116,98.296) 41.793,99.973 41.793,112.698 v1(43.47,114.375)
  Bottom Layer w0.09: U25.6@15.525,88.008 15.95,88.008 16.71,88.768 16.71,89.299 16.925,89.514 16.925,90.408 17.345,90.828 24.675,90.828 25.475,90.028 32.805,90.028 33.022,90.245 33.022,90.776 33.373,91.127 33.373,94.555 32.651,95.277 32.651,98.415 33.08,98.845 39.568,98.845 v1(40.116,98.296) ; v1(43.47,114.375) 45.075,114.375 v1(46.935,112.515)
EXT_1_1: J6.5 U25.25 | length 48.3
  Top Layer w0.09: v1(45.408,91.987) 46.402,91.987 47.105,92.69 J6.5@48.905,92.69
  Int3 (Sign) w0.09: v1(34.795,91.118) 35.087,90.825 44.246,90.825 v1(45.408,91.987)
  Bottom Layer w0.09: U25.25@4.055,85.608 10.452,85.608 11.052,86.208 13.589,86.208 14.189,86.808 14.189,87.002 14.79,87.603 16.25,87.603 16.636,87.989 16.636,88.042 17.022,88.428 24.377,88.428 25.306,89.357 27.761,89.357 27.89,89.228 30.275,89.228 30.284,89.237 31.326,89.237 31.335,89.228 32.905,89.228 v1(34.795,91.118)
EXT_2_1: J6.6 U25.24 | length 51.3
  Top Layer w0.09: v1(45.66,84.885) 46.38,85.605 46.38,88.715 47.815,90.15 J6.6@48.905,90.15
  Int3 (Sign) w0.09: v1(37.913,86.737) 40.114,86.737 41.967,84.885 v1(45.66,84.885)
  Bottom Layer w0.09: U25.24@4.055,84.808 9.921,84.808 11.116,86.003 16.26,86.003 16.429,85.834 17.151,85.834 17.335,86.018 24.216,86.018 25.006,85.228 30.275,85.228 30.345,85.298 31.265,85.298 31.335,85.228 34.392,85.228 35.117,85.953 37.129,85.953 v1(37.913,86.737)
EXT_3_1: J4.3 U25.1 | length 89.5
  Top Layer w0.09: v1(19.829,96.279) 20.407,96.279 22.119,97.991 v1(22.119,98.795)
  Int2 (Sign) w0.127: v1(27.615,116.04) 29.235,116.04 39.51,126.315 39.51,131.945 39.594,132.029 39.594,132.352 39.584,132.362 39.584,146.816 33.755,152.645 J4.3@33.755,164.408
  Int4 (PWR) w0.09: v1(22.119,98.795) 22.11,98.803 22.11,105.847 22.316,106.053 22.316,112.963 22.301,112.978 22.301,113.734 24.607,116.04 v1(27.615,116.04)
  Bottom Layer w0.09: U25.1@15.525,92.008 16.565,92.008 17.363,92.806 18.572,92.806 19.401,93.634 19.401,94.416 19.302,94.515 19.302,95.174 19.303,95.181 19.405,95.284 19.405,96.227 19.457,96.279 v1(19.829,96.279)
FG0_3: U10.25 U11.7 | length 54.7
  Int3 (Sign) w0.09: v1(-23.505,85.622) -22.854,86.273 -22.854,86.519 -22.152,87.221 -20.724,87.221 -20.542,87.403 3.769,87.403 3.969,87.603 4.209,87.603 4.268,87.662 11.794,87.662 11.913,87.543 19.44,87.543 19.486,87.589 27.553,87.589 v1(27.59,87.626)
  Bottom Layer w0.09: U10.25@-23.93,85.623 -23.507,85.623 v1(-23.505,85.622) ; v1(27.59,87.626) 27.668,87.626 27.866,87.428 29.335,87.428 U11.7@29.54,87.223
FG1_3: U10.24 U11.8 | length 55.2
  Int3 (Sign) w0.09: v1(-23.015,84.495) -21.726,85.784 -21.726,85.95 -20.496,87.18 3.536,87.18 3.936,86.78 4.209,86.78 4.525,86.464 15.994,86.464 16.108,86.578 27.663,86.578 v1(27.721,86.52)
  Bottom Layer w0.09: U10.24@-23.93,84.823 -23.505,84.823 -23.237,84.554 -23.074,84.554 v1(-23.015,84.495) ; v1(27.721,86.52) 27.805,86.52 27.902,86.423 U11.8@29.54,86.423
FH0_3: U10.1 U12.7 | length 60.5
  Int2 (Sign) w0.09: v1(25.046,89.623) 27.27,91.847 32.258,91.847 36.937,87.168 v1(42.419,87.168)
  Int3 (Sign) w0.09: v1(-10.932,91.369) -10.3,90.737 -3.741,90.737 -3.051,90.046 -1.168,90.046 -0.469,89.347 1.181,89.347 1.585,88.943 4.013,88.943 4.015,88.941 6.462,88.941 7.189,89.668 17.665,89.668 17.698,89.701 24.884,89.701 24.962,89.623 v1(25.046,89.623)
  Bottom Layer w0.09: U10.1@-12.46,92.023 -12.255,91.818 -11.394,91.818 -10.945,91.369 v1(-10.932,91.369) ; v1(42.419,87.168) 43.485,87.168 U12.7@43.54,87.223
FH1_3: U10.2 U12.8 | length 58.6
  Int2 (Sign) w0.09: v1(-10.932,90.547) -10.378,89.993 -3.188,89.993 -2.547,90.634 1.966,90.634 3.659,88.941 6.462,88.941 6.519,88.998 12.656,88.998 13.321,88.333 19.402,88.333 v1(19.774,87.961)
  Int3 (Sign) w0.09: v1(19.774,87.961) 19.811,87.998 40.863,87.998 v1(42.438,86.423)
  Bottom Layer w0.09: U10.2@-12.46,91.223 -11.608,91.223 v1(-10.932,90.547) ; v1(42.438,86.423) U12.8@43.54,86.423
GH0_3: U11.1 U12.25 | length 9.2
  Int4 (PWR) w0.09: v1(29.752,92.605) 29.752,92.521 29.686,92.455 29.686,87.181 v1(30.542,86.325)
  Bottom Layer w0.09: U11.1@29.54,92.023 29.547,92.023 29.752,92.228 v1(29.752,92.605) ; v1(30.542,86.325) 31.039,85.828 31.865,85.828 U12.25@32.07,85.623
GH1_3: U11.2 U12.24 | length 12.6
  Int2 (Sign) w0.09: v1(30.878,91.475) 31.215,91.475 35.003,87.687 v1(35.003,85.313)
  Bottom Layer w0.09: U11.2@29.54,91.223 30.625,91.223 v1(30.878,91.475) ; U12.24@32.07,84.823 34.513,84.823 v1(35.003,85.313)
GPIO0_RP_1: R40.1 U26.2 U29.6 U30.6 | length 87.4
  Top Layer w0.09: U30.6@-7.894,153.558 -7.557,153.558 -6.834,154.281 v1(-5.16,154.281) ; v1(24.299,139.054) 24.383,139.054 24.55,138.887
  Top Layer w0.127: U30.6@-7.894,153.558 -8.232,153.558 -8.955,154.281 -8.955,158.135 -8.233,158.858 U29.6@-7.895,158.858 ; 24.55,138.887 R40.1@25.204,138.887
  Int2 (Sign) w0.09: v1(20.762,150.657) 21.192,150.657 21.209,150.675 21.496,150.675 24.299,147.872 24.299,136.683 24.189,136.573 24.189,134.286 v1(25.695,132.78)
  Int3 (Sign) w0.09: v1(-5.16,154.281) -1.536,154.281 1.551,151.194 20.291,151.194 20.762,150.723 v1(20.762,150.657)
  Int4 (PWR) w0.09: v1(16.815,109.53) 16.865,109.579 16.865,115.028 17.055,115.218 v1(17.055,115.302)
  Bottom Layer w0.09: U26.2@15.422,108.948 15.847,108.948 16.429,109.53 v1(16.815,109.53) ; v1(17.055,115.302) 17.087,115.27 17.435,115.27 18.409,116.245 18.52,116.245 19.815,117.54 19.815,124.741 25.695,130.621 v1(25.695,132.78)
GPIO39: *.18 U16.44 U25.31 | length 128.2
  Top Layer w0.09: U16.44@-25.204,140.17 v1(-25.204,141.221)
  Int2 (Sign) w0.09: v1(-22.095,127.506) -15.856,121.267 v1(-15.856,116.049)
  Int3 (Sign) w0.09: v1(-15.633,92.023) -9.651,92.023 -8.8,91.172 -4.471,91.172 -4.467,91.176 3.684,91.176 v1(4.585,90.275)
  Int4 (PWR) w0.09: v1(-25.204,141.221) -25.204,135.889 -22.095,132.779 v1(-22.095,127.506) ; v1(-15.856,116.049) -15.856,113.053 -15.33,112.528 -15.33,101.957 -15.609,101.678 -15.609,98.387 -16.265,97.731 -16.265,96.254 -15.965,95.954 -15.965,95.198 -16.12,95.044 -16.12,94.735 -15.633,94.248 v1(-15.633,92.023)
  Bottom Layer w0.09: U25.31@4.055,90.408 4.453,90.408 v1(4.585,90.275)
  Bottom Layer w0.127: *.18@-41.409,118.563 -42.959,120.112 -44.36,120.112 -45.962,121.715 -45.962,144.027 -44.93,145.059 -27.943,145.059 -25.204,142.32 v1(-25.204,141.221)
GPIO40: *.16 U16.45 U25.30 | length 119.5
  Top Layer w0.09: U16.45@-25.604,140.17 v1(-25.604,140.803)
  Int2 (Sign) w0.09: v1(-22.674,127.508) -16.566,121.399 v1(-16.566,116.034)
  Int3 (Sign) w0.09: v1(-5.924,91.544) -5.879,91.498 4.122,91.498 v1(6.308,89.313)
  Int4 (PWR) w0.09: v1(-25.604,140.803) -25.604,135.621 -22.674,132.69 v1(-22.674,127.508) ; v1(-16.566,116.034) -16.155,115.624 -16.155,113.057 -16.379,112.833 -16.379,112.017 -16.341,111.978 -16.341,109.19 -16.544,108.987 v1(-16.544,104.241) ; v1(-11.092,99.597) -10.43,98.935 -10.43,98.513 -10.529,98.414 -10.529,97.817 -9.252,96.539 -6.66,96.539 -5.995,95.875 -5.995,95.285 -6.098,95.182 -6.098,94.317 -6.167,94.248 -6.167,91.787 v1(-5.924,91.544)
  Bottom Layer w0.09: v1(-16.544,104.241) -11.9,99.597 v1(-11.092,99.597) ; U25.30@4.055,89.608 4.231,89.784 5.836,89.784 v1(6.308,89.313)
  Bottom Layer w0.127: *.16@-41.409,121.103 -42.615,122.309 -44.016,122.309 -44.94,123.233 -44.94,139.762 -43.897,140.805 -37.801,140.805 -34.788,143.818 -28.619,143.818 v1(-25.604,140.803)
GPIO41: *.12 U16.47 U25.29 | length 101.8
  Top Layer w0.09: U16.47@-26.404,140.17 -26.35,139.838 -26.307,139.448 -26.304,139.45 v1(-26.292,139.45)
  Int2 (Sign) w0.09: v1(-23.145,127.215) -17.263,121.333 v1(-17.263,116.769) ; v1@-18.108,102.945 -13.914,102.945 -10.838,99.869 v1(-10.466,99.869)
  Int4 (PWR) w0.09: v1(-26.292,139.45) -26.292,134.906 -23.145,131.759 v1(-23.145,127.215) ; v1(-18.126,102.945) -17.769,103.301 -17.769,112.609 -18.149,112.989 -18.149,114.394 -17.263,115.28 v1(-17.263,116.769) ; v1(-5.886,96.963) -5.22,96.298 -1.338,96.298 -0.559,95.519 -0.559,92.947 -0.336,92.724 -0.336,90.24 -0.41,90.167 v1(-0.41,90.083)
  Bottom Layer w0.09: v1(-10.466,99.869) -9.684,99.087 -6.668,99.087 -5.886,98.305 v1(-5.886,96.963) ; v1(-0.41,90.083) -0.41,89.642 0.805,88.428 2.275,88.428 2.655,88.808 U25.29@4.055,88.808
  Bottom Layer w0.127: *.12@-41.409,126.183 ccw(c-41.409,128.723) -38.869,128.723 -38.869,138.924 -37.782,140.012 -26.541,140.012 -26.307,139.777 -26.307,139.465 v1(-26.292,139.45)
GPIO42: *.6 U16.48 U25.28 | length 112.6
  Top Layer w0.09: v1(-26.804,139.329) U16.48@-26.804,140.17
  Int2 (Sign) w0.09: *.6@-41.409,133.803 -41.409,133.871 -37.08,138.2 v1(-37.08,138.268) ; v1(-23.631,126.908) -17.927,121.205 v1(-17.927,116.769)
  Int3 (Sign) w0.09: v1(-37.08,138.268) -35.156,138.268 -34.816,137.928 -32.747,137.928 -32.578,137.759 -32.235,137.759 -31.891,137.415 -30.031,137.415 -30.025,137.409 -29.56,137.409 -29.554,137.415 -28.663,137.415 -26.804,139.273 v1(-26.804,139.329) ; v1(-18.345,86.746) -17.579,85.98 -11.202,85.98 -11.161,86.021 -4.225,86.021 -2.646,84.442 5.035,84.442 v1(5.041,84.436)
  Int4 (PWR) w0.09: v1(-26.804,139.329) -26.804,134.971 -23.631,131.798 v1(-23.631,126.908) ; v1(-22.482,86.365) -23.798,87.68 -23.798,95.254 -23.775,95.277 -23.775,103.483 -23.898,103.606 -23.898,111.812 -23.778,111.932 -23.778,113.054 -23.229,113.603 -23.229,113.655 -19.671,117.213 -18.371,117.213 v1(-17.927,116.769) ; v1(4.055,87.975) 5.041,86.989 v1(5.041,84.436)
  Bottom Layer w0.09: v1(-22.482,86.365) -22.101,86.746 v1(-18.345,86.746) ; v1(4.055,87.975) U25.28@4.055,88.008
GPIO45: *.4 J5.5 U16.51 U25.27 | length 171.1
  Top Layer w0.09: U16.51@-28.004,140.17 v1(-28.004,140.803)
  Int2 (Sign) w0.09: *.4@-41.409,136.343 -35.642,142.11 -28.309,142.11 -28.004,141.805 v1(-28.004,140.803) ; v1(-24.176,126.542) -23.823,126.542 -18.551,121.27 v1(-18.551,116.803) ; v1(-18.333,85.884) -12.369,85.884 -9.87,88.383 -3.548,88.383 -2.344,87.18 4.062,87.18 v1(4.067,87.175)
  Int4 (PWR) w0.09: v1(-28.004,140.803) -28.004,135.903 -24.176,132.075 v1(-24.176,126.542) ; v1(-18.551,116.803) -18.88,116.474 -18.88,114.066 -18.695,113.881 -18.695,112.997 -18.512,112.814 -18.512,111.373 -18.703,111.182 -18.703,110.132 -18.898,109.937 -18.898,105.629 -18.718,105.449 -18.718,100.825 -18.748,100.795 -18.748,98.736 -18.505,98.494 -18.505,94.368 -18.363,94.226 -18.363,94.198 -18.345,94.18 -18.345,89.075 -17.973,88.703 -17.973,86.244 v1(-18.333,85.884)
  Bottom Layer w0.09: v1(-18.551,116.803) -18.213,117.141 -16.29,117.141 -15.569,116.421 -14.947,116.421 -14.707,116.181 -12.158,116.181 -12.09,116.25 12.163,116.25 13.673,114.74 29.517,114.74 31.042,116.265 41.644,116.265 42.139,115.77 J5.5@48.905,115.77 ; U25.27@4.055,87.208 4.055,87.187 v1(4.067,87.175)
GPIO46: J5.4 U16.52 U25.26 | length 154.7
  Top Layer w0.09: v1(-28.415,141.171) -28.393,141.149 -28.404,141.138 U16.52@-28.404,140.17
  Int2 (Sign) w0.09: v1(-25.926,126.541) -23.689,124.304 -21.854,124.304 -19.17,121.62 v1(-19.17,116.841) ; v1(-19.266,115.362) -19.266,115.035 -18.695,114.464 -18.695,112.932 -18.884,112.744 v1(-18.884,112.66) ; v1(-2.939,86.808) -2.195,86.064 3.711,86.064 v1(4.055,86.408)
  Int3 (Sign) w0.09: v1(-19.266,115.362) -19.218,115.41 -19.218,116.793 v1(-19.17,116.841) ; v1(-18.717,91.167) -14.553,91.167 -13.532,90.147 -8.085,90.147 -7.613,89.674 v1(-2.908,89.674)
  Int4 (PWR) w0.09: v1(-28.415,141.171) -28.415,136.045 -25.926,133.555 v1(-25.926,126.541) ; v1(-18.884,112.66) -18.893,112.65 -18.893,110.211 -19.088,110.016 -19.088,105.55 -18.908,105.37 -18.908,100.904 -18.938,100.874 -18.938,98.658 -18.695,98.415 -18.695,94.289 -18.553,94.147 -18.553,92.781 -18.717,92.617 v1(-18.717,91.167) ; v1(-2.939,86.808) -2.924,86.823 -2.924,89.659 v1(-2.908,89.674)
  Bottom Layer w0.09: v1(-19.17,116.841) -18.679,117.331 -16.211,117.331 -15.491,116.611 -14.868,116.611 -14.628,116.371 -12.237,116.371 -11.499,117.11 3.377,117.11 4.046,116.44 12.242,116.44 13.752,114.93 29.438,114.93 31.517,117.009 47.604,117.009 J5.4@48.905,118.31
LM2660_BOOST_12: R12.2 U17.1 U27.1 | length 12.9
  Top Layer w0.3: U27.1@-1.365,140.668 R12.2@-1.365,144.225
  Top Layer w0.5: v1(-3.96,140.625) -3.952,140.617 -1.417,140.617 U27.1@-1.365,140.668
  Int3 (Sign) w0.5: v1(-3.96,140.625) -4.53,140.055 -4.53,136.827 U17.1@-2.593,134.891
LM2660_C1+_12: C19.1 C22.2 U17.2 U27.2 | length 14.9
  Top Layer w0.127: C22.2@-7.745,139.008 -7.586,139.167 C22.2@-7.41,139.343 ; C19.1@-7.586,142.467 C19.1@-7.445,142.608
  Top Layer w0.4: C22.2@-7.586,139.167 C19.1@-7.586,142.467 ; C22.2@-7.41,139.343 U27.2@-1.42,139.343
  Int3 (Sign) w0.5: v1(-1.05,139.38) -0.053,138.383 U17.2@-0.053,134.891
LM2660_C1-_12: C22.1 C24.2 U17.4 U27.4 | length 22.1
  Top Layer w0.4: C22.1@-10.545,139.008 -10.545,137.423 -10.148,137.025 -8.22,137.025 -7.995,136.8 -7.995,135.657 C24.2@-7.545,135.208 -6.787,135.966 ; v1(-1.42,136.803) cw(c-1.644,137.027) -1.644,136.71 -4.991,136.71 ; -6.787,135.966 cw(c-4.991,134.17) -4.991,136.71 ; -6.787,135.966 cw(c-4.991,134.17) -4.991,136.71
  Int2 (Sign) w0.5: v1(-1.42,136.803) 3.115,136.803 U17.4@5.027,134.891
LM2660_OUT_12: C23.2 D6.1 TP14.1 U17.5 U27.5 | length 29
  Top Layer w0.4: TP14.1@7.605,136.408 8.214,135.798 8.678,135.798 C23.2@9.426,135.051
  Top Layer w0.5: U27.5@4.23,136.803 v1(5.652,136.803) 7.074,136.803 7.469,136.408 TP14.1@7.605,136.408
  Int3 (Sign) w0.5: U17.5@5.027,142.511 5.027,137.428 v1(5.652,136.803)
  Bottom Layer w0.5: D6.1@-8.245,138.958 -6.557,138.958 -5.115,140.4 -5.115,142.86 -4.337,143.638 3.9,143.638 U17.5@5.027,142.511
LNA_IN_6: C57.2 L2.2 U16.1 | length 4.7
  Top Layer w0.156: L2.2@-32.942,142.937 -32.569,142.563 cw(c-33.533,141.598) -32.181,141.781 cw(c-33.533,141.598) -32.17,141.639 cw(c-33.533,141.598) C57.2@-32.169,141.598 cw(c-33.258,140.509) -31.718,140.509 -31.718,139.74 ccw(c-31.296,139.74) -31.296,139.318 U16.1@-30.857,139.318
MCU_RUN_5: C53.2 R8.1 SW2.2 U13.26 | length 72.7
  Top Layer w0.09: U13.26@33.657,132.331 33.661,132.337 33.661,132.82 33.724,132.883 35.432,132.883 v1(35.821,132.494)
  Top Layer w0.127: v1(-1.505,162.355) SW2.2@-1.505,163.556 ; v1(35.821,132.494) 36.124,132.191 37.394,132.191 37.671,131.914 37.671,130.35 C53.2@37.638,130.318
  Int3 (Sign) w0.127: v1(-1.505,162.355) 19.429,162.355 cw(c19.429,161.554) 19.995,162.12 ccw(c21.697,163.822) 21.697,161.415 32.486,161.415 cw(c32.486,158.875) 34.282,160.671 cw(c32.021,158.409) 35.219,158.409 35.219,133.096 35.724,132.591 v1(35.821,132.494)
MUX_NANO_RX_14: Q1.1 Q1.2 R47.2 U29.3 | length 7
  Top Layer w0.3: R47.2@-13.745,155.358 -13.172,155.358 -12.845,155.685 Q1.1@-12.845,156.908 ; Q1.2@-12.845,158.808 Q1.1@-12.845,156.908 ; U29.3@-9.996,156.958 -10.021,156.933 -12.82,156.933 Q1.1@-12.845,156.908
MUX_NANO_TX_14: Q2.1 Q2.2 R49.2 U30.3 | length 7
  Top Layer w0.3: R49.2@-13.745,150.108 -13.137,150.108 -12.84,150.405 -12.84,151.643 Q2.1@-12.825,151.658 ; Q2.2@-12.825,153.558 Q2.1@-12.825,151.658 ; U30.3@-9.995,151.658 Q2.1@-12.825,151.658
Net*_8: *.8 U30.1 | length 50.3
  Top Layer w0.127: v1@-17.185,154.01 v1(-17.164,154.01) -10.786,154.01 -10.333,153.558 U30.1@-9.995,153.558
  Int2 (Sign) w0.127: *.8@-41.409,131.263 -42.662,132.515 -44.062,132.515 -45.033,133.485 -45.033,136.887 -44.325,137.595 -40.515,137.595 -35.352,142.758 -28.417,142.758 v1(-17.164,154.01)
Net*_10: *.10 U29.1 | length 59
  Top Layer w0.127: v1(-16.883,159.26) -11.675,159.26 -11.273,158.858 U29.1@-9.996,158.858
  Int2 (Sign) w0.127: *.10@-41.409,128.723 -42.775,130.089 -44.176,130.089 -45.26,131.172 -45.26,139.442 -43.897,140.805 -37.626,140.805 -35.394,143.037 -29.269,143.037 -16.883,155.424 v1(-16.883,159.26)
NetANT1_1: ANT1.1 C54.2 L1.1 | length 31.9
  Top Layer w0.127: ANT1.1@-40.224,157.294 ccw(c-40.291,157.402) -40.181,157.338 -39.991,157.668 cw(c-39.881,157.604) -39.973,157.691 -39.935,157.731 -39.33,157.731 ANT1.1@-38.783,158.278 ; L1.1@-37.064,149.617 ccw(c-38.715,149.617) -37.547,150.785 C54.2@-37.82,151.058 ccw(c-37.82,152.647) -36.697,151.523 -36.446,151.774 ccw(c-37.957,153.285) -35.82,153.285 -35.88,153.602 ccw(c-36.005,153.578) -35.896,153.644 ; -35.897,153.645 -36.091,153.962 ANT1.1@-37.329,156.002 -38.614,158.014 -38.68,158.122 ANT1.1@-38.783,158.278 ; ANT1.1@-33.795,161.335 -34.476,160.699 -34.41,160.59 ANT1.1@-33.912,159.421 -33.604,159.113 -33.604,158.423 -34.172,157.856 ANT1.1@-34.419,157.856 -35.315,157.526 -35.423,157.459 ANT1.1@-36.044,158.115 -36.86,159.089 -36.926,159.197 ANT1.1@-38.783,158.278 ; ANT1.1@-32.037,160.571 -31.416,159.915 -31.308,159.981 ANT1.1@-30.412,160.312 -29.711,160.96 -29.602,161.026 ANT1.1@-29.905,161.877 -30.403,163.046 -30.469,163.154 ANT1.1@-29.787,163.791 -28.911,164.109 -28.845,164.001 ANT1.1@-27.69,162.472